# Altium PCB PCB1.PcbDoc
Units mm, origin at the board's own origin, x right, y up, seen from the top; angles counter-clockwise.
Board outline 55 x 44 mm, 2 copper layers (Top Layer, Bottom Layer); 7 components, 8 nets, 20 pads, 7 vias.
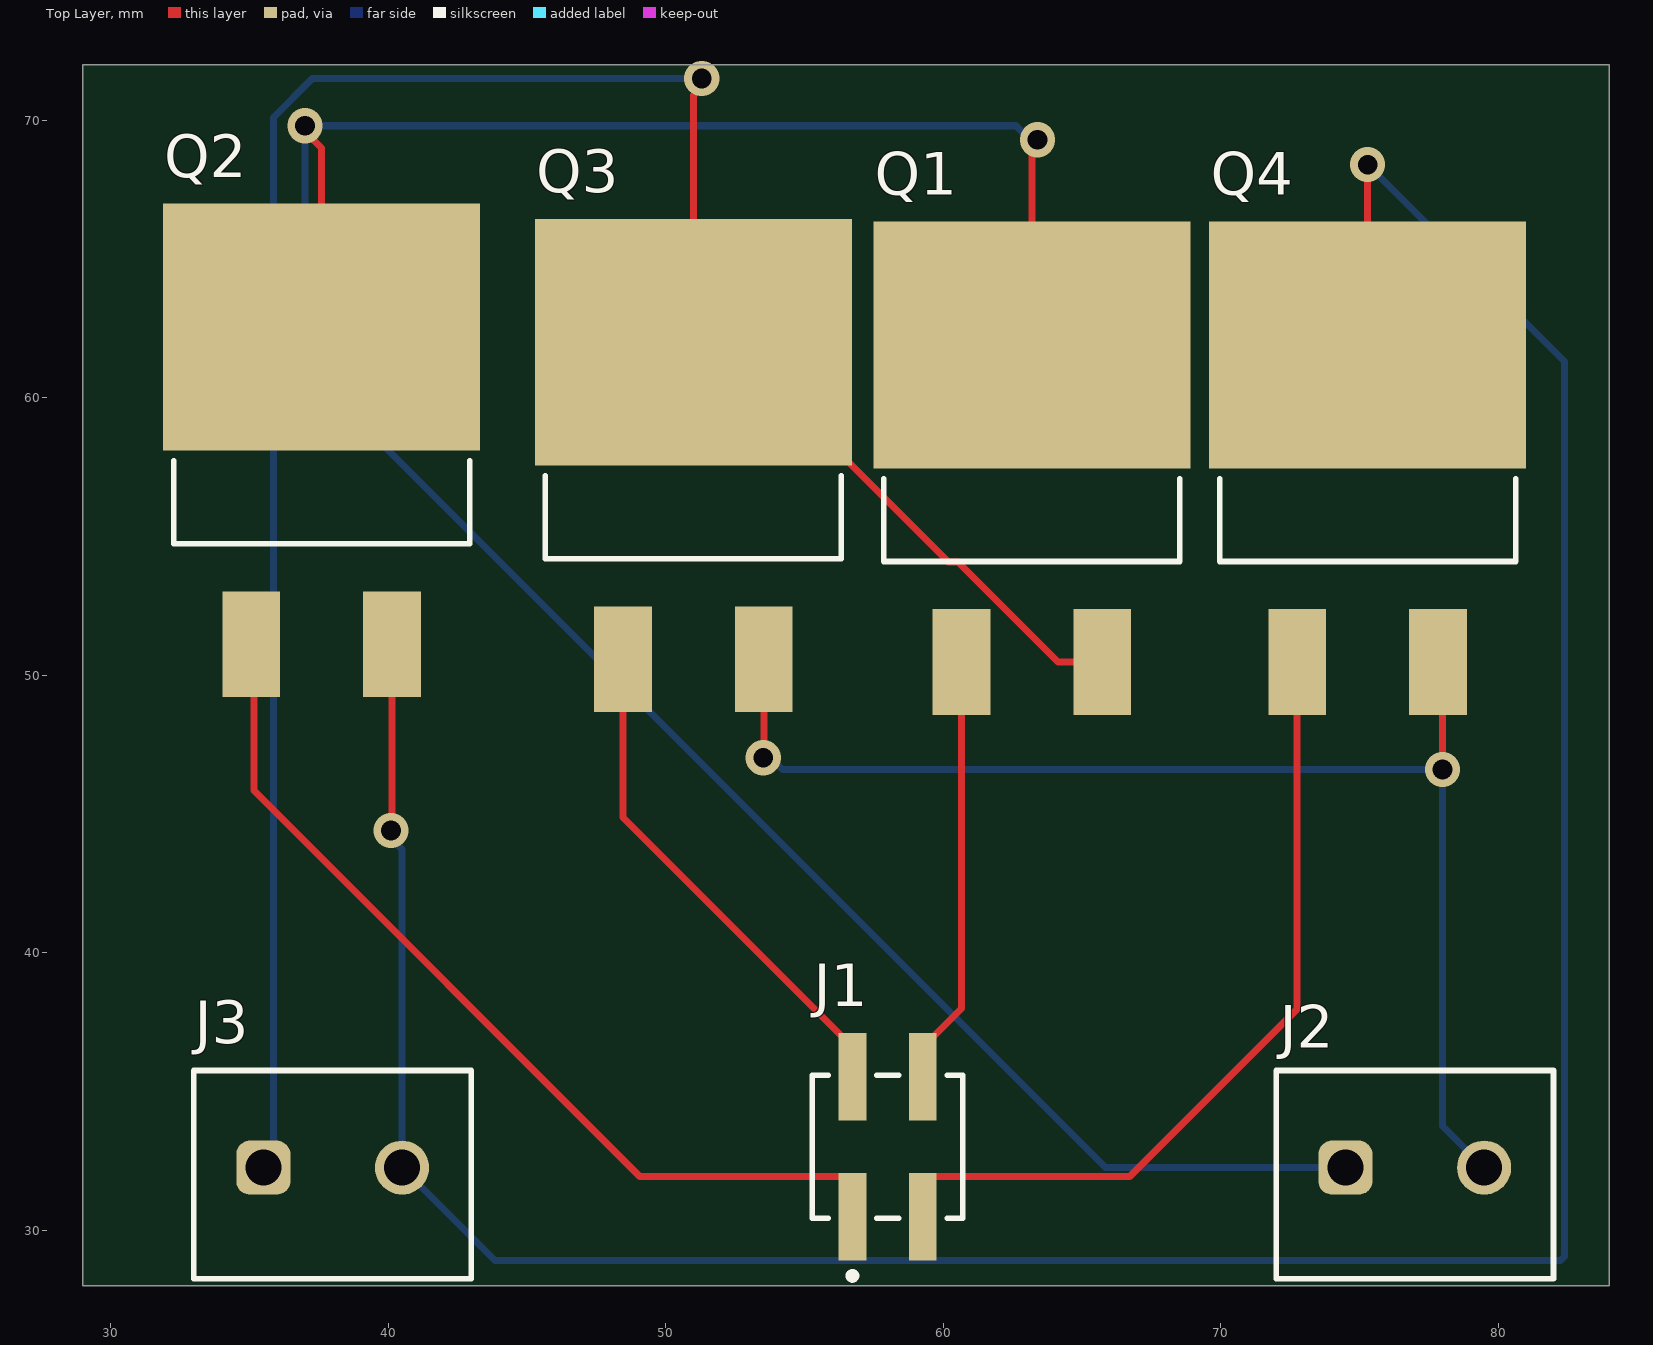
[diagram p0: Top Layer view]
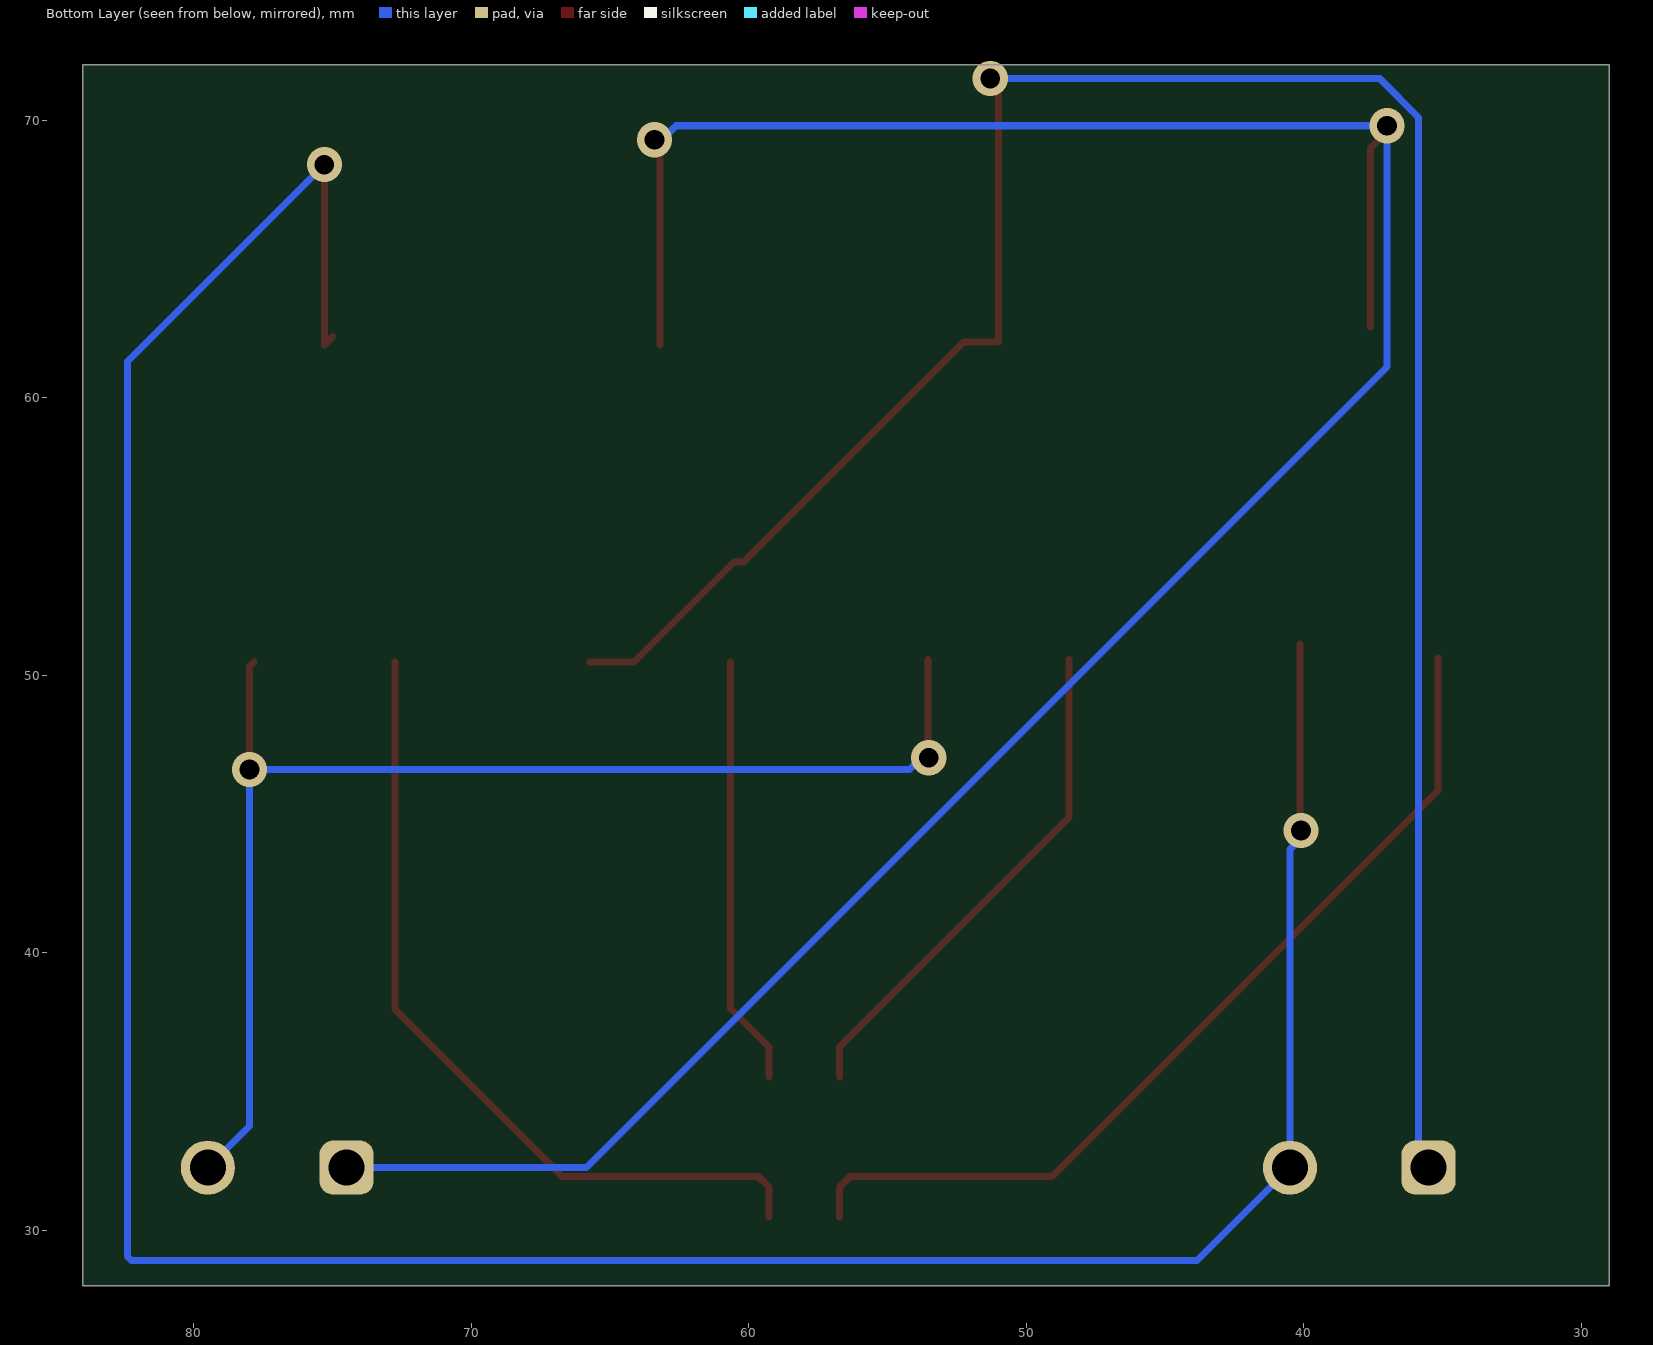
[diagram p1: Bottom Layer view, seen from below]
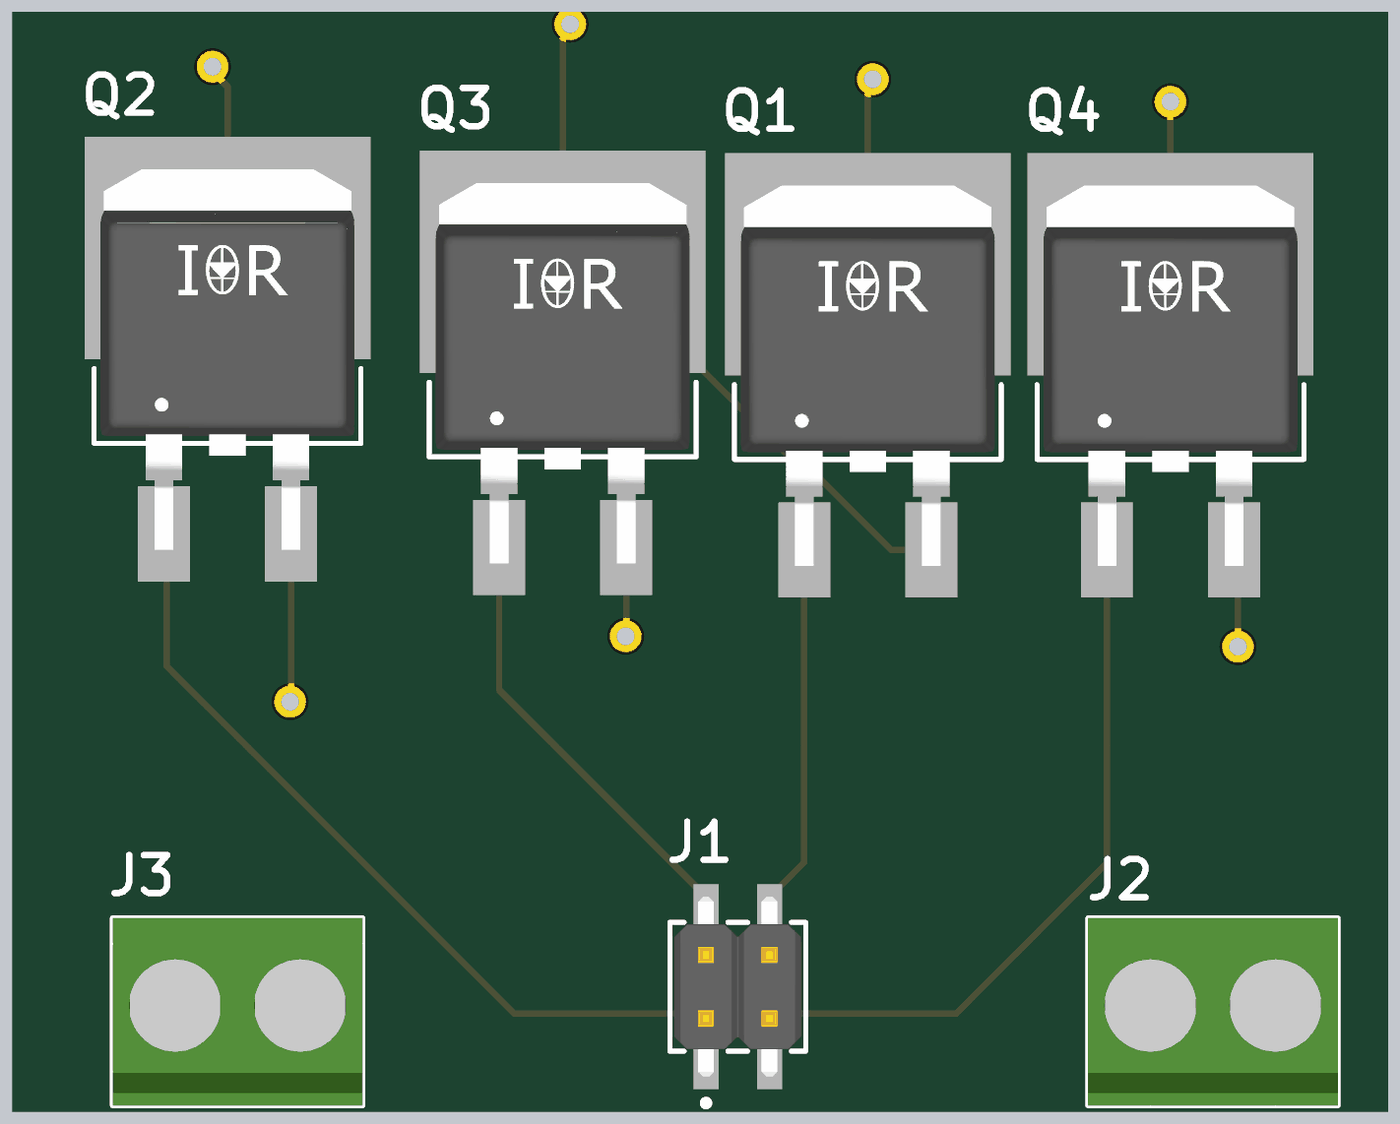
[diagram p2: 3D render of the assembled board from above, using the file's embedded part models]

## Layer stack, top to bottom
Top Solder: solder mask 0.0102, Solder Resist, Dk 3.5
Top Layer: signal copper 0.0356
Dielectric 1: dielectric 0.32, FR-4, Dk 4.8
Bottom Layer: signal copper 0.0356
Bottom Solder: solder mask 0.0102, Solder Resist, Dk 3.5

## Board outline
29,28 29,72 84,72 84,28

## Design rules (kind name [scope] priority, off if disabled: settings)
Clearance [All] p1: gap=0.254 ignorepadtopadclearanceinfootprint=FALSE
PolygonConnect [All] p1: connectstyle=Relief reliefconductorwidth=0.254 reliefentries=4 polygonreliefangle="90 Angle" airgapwidth=0.254
RoutingVias [All] p1: holewidth=0.711 width=1.27 viastyle="Through Hole" minholewidth=0.711 minwidth=1.27 maxholewidth=0.711 maxwidth=1.27
SolderMaskExpansion [All] p1: expansion=0.102 istentingtop=FALSE
SupplyNets "Schematic Supply Nets_1" [InNet('+12')] p1: voltage=0.000
SupplyNets "Schematic Supply Nets" [InNet('GND')] p2: voltage=0.000
Width [All] p1: maxlimit=0.254 minlimit=0.254 preferedwidth=0.254
30 further rules are at their usual default settings.

## Components (designator, comment, footprint, x,y, rotation, side; value= is the part's Value field where it differs from the comment)
J1 "M20-8760242" FP-M20-8760242-MFG 58,33 r0 top
J2 "691137710002" 691137710002 77,32 r0 top
J3 "691137710002" 691137710002 38,32 r0 top
Q1 "IRF4905STRLPBF" FP-PG-TO263-3-MFG 63.2,57.455 r0 top
Q2 "IRF4905STRLPBF" FP-PG-TO263-3-MFG 37.6,58.1 r0 top
Q3 "IRF540NSTRLPBF" FP-PG-TO263-3-MFG 51,57.555 r0 top
Q4 "IRF540NSTRLPBF" FP-PG-TO263-3-MFG 75.3,57.455 r0 top

## Footprints (in the part's own frame and the unit in brackets; to place one, negate y for a bottom-side part, rotate by r counter-clockwise, add the part's x,y. Pads: shape width x height; smd on the part's side, far side on the other; paste and mask are expansions set on the pad)
691137710002 [mm] "Horizontal Cable Entry with Pressure Clamp, pitch 5mm, 02p"
  rrect50% 1.95x1.95 hole 1.3: 1(-2.5,0.25)
  round 1.95 hole 1.3: 2(2.5,0.25)
  silkscreen extent -5,-3.75 5,3.75, body extent -5,-3.75 5,3.75, height 11.6
FP-M20-8760242-MFG [mm]
  rect 1x3.15 smd paste+0 mask+0: 1(-1.27,-2.525) 2(-1.27,2.525) 3(1.27,-2.525) 4(1.27,2.525)
  silkscreen extent -2.72,-4.77 2.72,2.58, body extent -2.82,-4.2 2.82,4.2, height 0.25
FP-PG-TO263-3-MFG [mm]
  rect 2.08x3.81 smd paste+0 mask+0: 1(-2.54,-6.985) 3(2.54,-6.985)
  rect 11.43x8.89 smd paste+0 mask+0: 4(0,4.445)
  silkscreen extent -5.34,-3.36 5.34,-0.38, body extent -5.81,-8.99 5.81,8.99, height 0.25

## Part data
J1: library part CMP-15831-000048-1, "CONN HEADER SMD 4POS 2.54MM", Color=Black, Contact Resistance=25mR, Max Current Rating=3A, Max Operating Temperature=105°C, Min Operating Temperature=-40°C, Package Quantity=1000, Connector Type="Male Pin", Contact Material=Bronze, Contact Mating Length=0.228inch, Contact Plating=Gold, Contact Type="Male Pin", Depth=5.08mm, Gender=Male, Housing Color=Black, Housing Material=Nylon, Length=5.08mm, Mount="Surface Mount", Number of Contacts=4, Number of Positions=4, Number of Rows=2, Orientation=Straight, Packaging=Bulk, Pitch=2.54mm, Radiation Hardening=No, RoHS Compliant=Yes, Row Spacing=0.1inch, Series=M20, Termination=Solder
J2 J3: library part CMP-1502-03324-2, Current Rating=16A, Max Operating Temperature=120°C, Min Operating Temperature=-30°C, Voltage Rating=300V, Contact Material="Nickel, Tin", Height=11.6mm, Lead Pitch=5mm, NexarPartId=78871135, Number of Contacts=2, Number of Pins=2, Number of Rows=1, Packaging=Box, RoHS=Non-Compliant
Q1 Q2: library part CMP-32901-000610-1, "MOSFET P-CH 55V 42A D2PAK", Case/Package=TO-263-3, Continuous Drain Current (ID)=42A, Drain to Source Voltage (Vdss)=-55V, Input Capacitance=3.5nF, Max Operating Temperature=150°C, Max Power Dissipation=170W, Min Operating Temperature=-55°C, Threshold Voltage=4V, Halogen Free="Halogen Free", Lead Free="Contains Lead", Max Dual Supply Voltage=-55V, Mount="Surface Mount", Number of Pins=3, Packaging="Tape and Reel", Rds On Max=20mR, REACH SVHC="No SVHC", RoHS Compliant=Yes
Q3 Q4: library part CMP-00196-65873407-1, "IRF540NSTRLPBF Transistor MOSFET N Channel 100 Volt 33 Amp 3-Pin 2+ Tab D2pak Tape And Reel", Case/Package=D2PAK, Continuous Drain Current (ID)=33A, Drain to Source Breakdown Voltage=100V, Drain to Source Resistance=44mΩ, Gate to Source Voltage (Vgs)=20V, Input Capacitance=1.96nF, Max Junction Temperature (Tj)=175°C, Max Power Dissipation=3.8W, Min Operating Temperature=-55°C, Package Quantity=800, Resistance=44MΩ, Threshold Voltage=4V, Contact Plating=Tin, Current Rating=33A, Drain to Source Voltage (Vdss)=100V, Dual Supply Voltage=100V, Element Configuration=Single, Fall Time=35ns, Height=4.826mm, Lead Free="Lead Free", Length=10.668mm, Lifecycle Status=NRND, Max Operating Temperature=175°C, Mount="Surface Mount", NexarPartId=65873407, Nominal Vgs=4V, Number of Channels=1, Number of Elements=1, Number of Pins=3, On-State Resistance=44mΩ, Packaging=Bulk, Power Dissipation=3.8W, Radiation Hardening=No, Rds On Max=8.4mΩ, REACH SVHC="No SVHC", Recovery Time=170ns, Rise Time=35ns, RoHS=Compliant, Schedule B="8541290080, 8541290080", Termination=SMD/SMT, Turn-Off Delay Time=39ns, Turn-On Delay Time=11ns, Voltage Rating (DC)=100V, Width=9.65mm

## Via types
v1: diameter 1.27, hole 0.711, Top Layer to Bottom Layer, 7 vias

## Nets (pads, with @x,y where several pads share a name; then routed paths per layer and width w, separated by ;. In a path a pad name is that pad's centre, name@x,y a point inside that pad or via, vN(x,y) a via of type N, cw(c..) or ccw(c..) an arc to the next point about the centre after c; other vN are vias at no path point)
+12: J2.1 Q1.4 Q2.4 | length 99.2
  Top Layer w0.254: v1@37.2,69.4 37.6,69 Q2.4 ; v1@63.1,69.3 63.2,69.2 Q1.4
  Bottom Layer w0.254: v1(63.4,69.3) 63.125,69.3 62.625,69.8 v1(37,69.8) 37,61.1 65.85,32.25 J2.1
GND: J2.2 Q3.3 Q4.3 | length 47.1
  Top Layer w0.254: v1@53.5,47 v1(53.52,47.02) 53.54,47.04 Q3.3 ; Q4.3 78,50.31 v1(78,46.6)
  Bottom Layer w0.254: v1(53.52,47.02) 53.795,47.02 54.215,46.6 v1(78,46.6) 78,33.75 J2.2
NetJ1_1: J1.1 Q2.1 | length 33.3
  Top Layer w0.254: Q2.1@35.16,50.615 35.16,45.84 49.077,31.923 56.357,31.923 56.73,31.55 J1.1
NetJ1_2: J1.2 Q3.1 | length 18.5
  Top Layer w0.254: Q3.1 48.46,44.87 56.73,36.6 J1.2
NetJ1_3: J1.3 Q4.1 | length 29.7
  Top Layer w0.254: J1.3 59.27,31.55 59.643,31.923 66.723,31.923 72.76,37.96 Q4.1
NetJ1_4: J1.4 Q1.1 | length 15.5
  Top Layer w0.254: J1.4 59.27,36.6 60.66,37.99 Q1.1
NetJ3_1: J3.1 Q1.3 Q3.4 | length 83
  Top Layer w0.254: v1@51.4,71.3 51,70.9 Q3.4 52.27,62 60.194,54.076 60.538,54.076 64.144,50.47 Q1.3
  Bottom Layer w0.254: J3.1 35.861,32.611 35.861,70.097 37.263,71.5 v1(51.3,71.5)
NetJ3_2: J3.2 Q2.3 Q4.4 | length 111.1
  Top Layer w0.254: Q2.3 40.14,44.76 v1@40.3,44.6 ; Q4.4@75,62.2 Q4.4 75.3,67.9 v1@75.4,68
  Bottom Layer w0.254: v1(40.1,44.4) 40.1,44.125 40.5,43.725 J3.2 43.85,28.9 82.251,28.9 82.4,29.049 82.4,61.3 v1(75.3,68.4)

## Silkscreen, mask and mechanical layers (free items; w line width, h text height)
Mechanical 1:
  the board outline again, w0.254